# Altium PCB PCB1.pcbdoc (part 4 of 4)
Units mil, origin at the board's own origin, x right, y up, seen from the top; angles counter-clockwise.
Board outline 3346.69 x 4227.01 mil, 4 copper layers (Top Layer, Inner1, Inner2, Bottom Layer); 103 components, 145 nets, 660 pads, 276 vias.
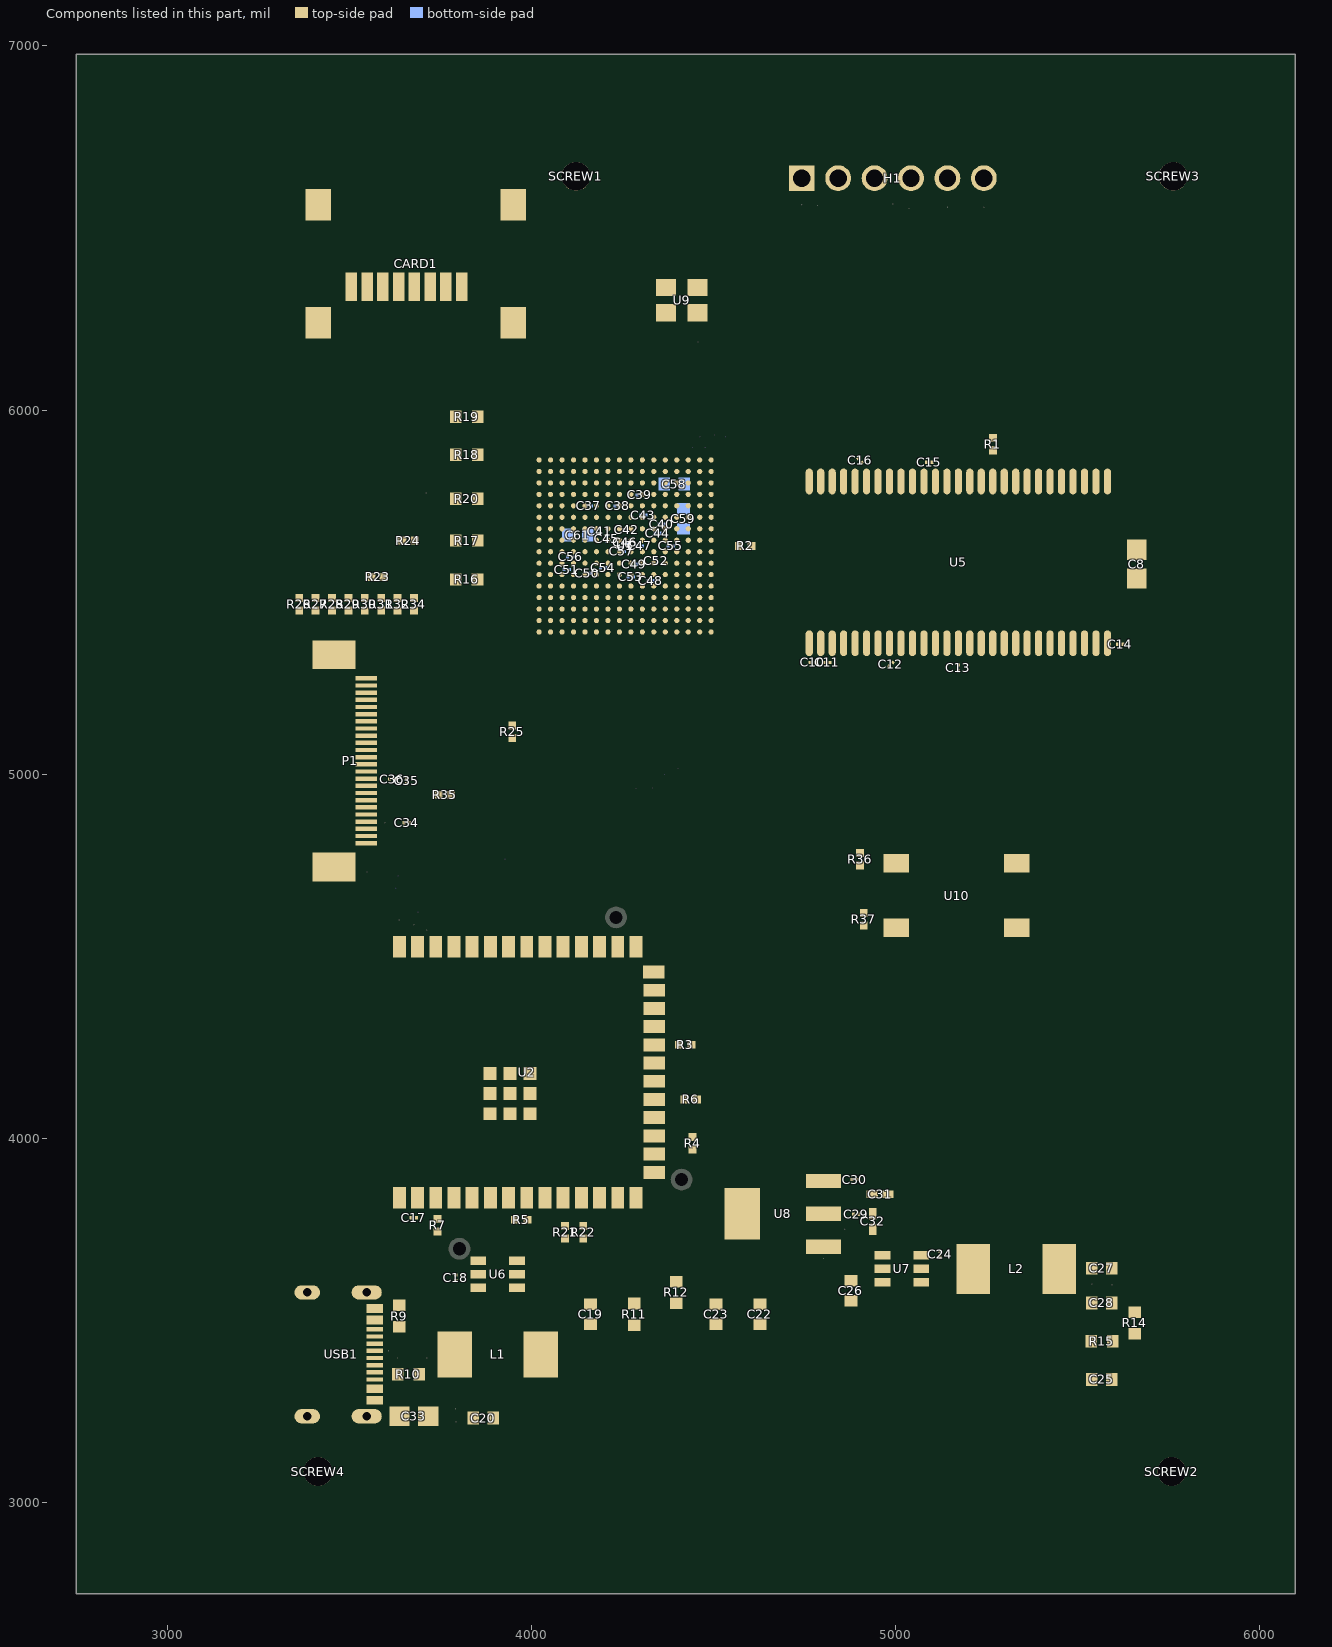
[diagram p6: the components of this part, seen from the top]

## Other copper (continued)
Bottom Layer:
  region net DONE: 4354.87,5007.14 4374.87,5007.14 4374.87,4991.35 4354.67,4991.35 4354.87,4991.55
  region net +1V1: 4392.11,5023.94 4412.11,5023.94 4412.11,5008.14 4391.91,5008.14 4392.11,5008.35
  region net PROGRAMN: 4277.11,4969.07 4297.11,4969.07 4297.11,4953.27 4276.91,4953.27 4277.11,4953.48
  region net RESET: 3917.23,4774.59 3937.23,4774.59 3937.23,4758.79 3917.03,4758.79 3917.23,4759
  region net +1V8: 3623.73,4729.14 3643.73,4729.14 3643.73,4713.35 3623.53,4713.35 3623.73,4713.55
  region net INITN: 3678.01,4629 3698.01,4629 3698.01,4613.21 3677.81,4613.21 3678.01,4613.41
  region net GND: 3617.11,4694.91 3637.11,4694.91 3637.11,4679.11 3616.91,4679.11 3617.11,4679.31
  region net GND: 4322.11,4969.91 4342.11,4969.91 4342.11,4954.11 4321.91,4954.11 4322.11,4954.31
  region: 4324.49,5428.9 4341.81,5438.9 4349.71,5425.22 4332.21,5415.12 4332.28,5415.39
  region: 4467.11,5904.91 4487.11,5904.91 4487.11,5889.11 4466.91,5889.11 4467.11,5889.31
  region: 4432.11,5904.91 4452.11,5904.91 4452.11,5889.11 4431.91,5889.11 4432.11,5889.31
  region: 4452.11,5934.91 4472.11,5934.91 4472.11,5919.11 4451.91,5919.11 4452.11,5919.31
  region: 4522.11,5934.91 4542.11,5934.91 4542.11,5919.11 4521.91,5919.11 4522.11,5919.31
  region: 4492.11,5939.91 4512.11,5939.91 4512.11,5924.11 4491.91,5924.11 4492.11,5924.31

## Silkscreen, mask and mechanical layers (free items; w line width, h text height)
Top Silkscreen Layer:
  text "JTAG" at 5292.01,6567.01 h120 r180